# EAGLE board INTERFACE_LPC11u35 (EAGLE 7.6.0)
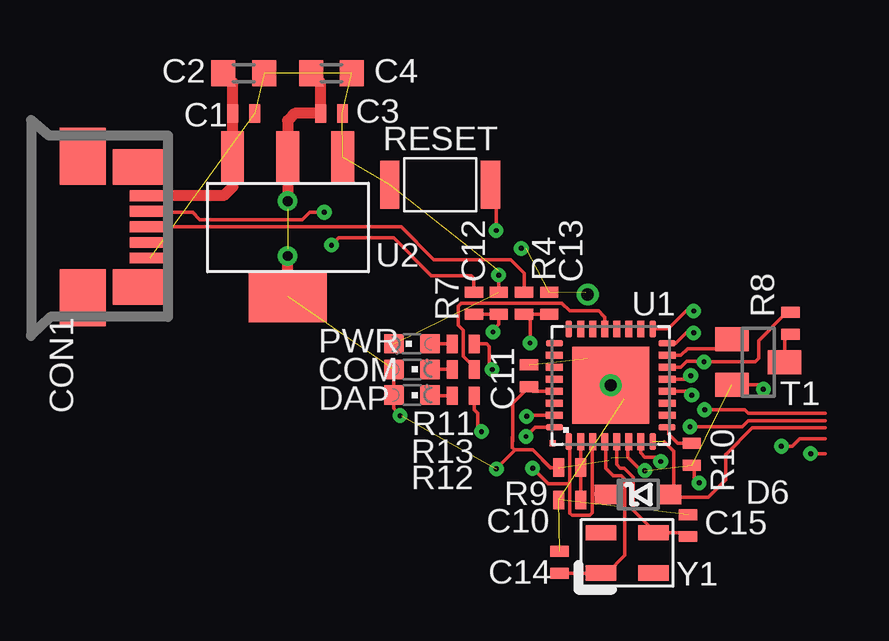
[diagram p0: board, top side]
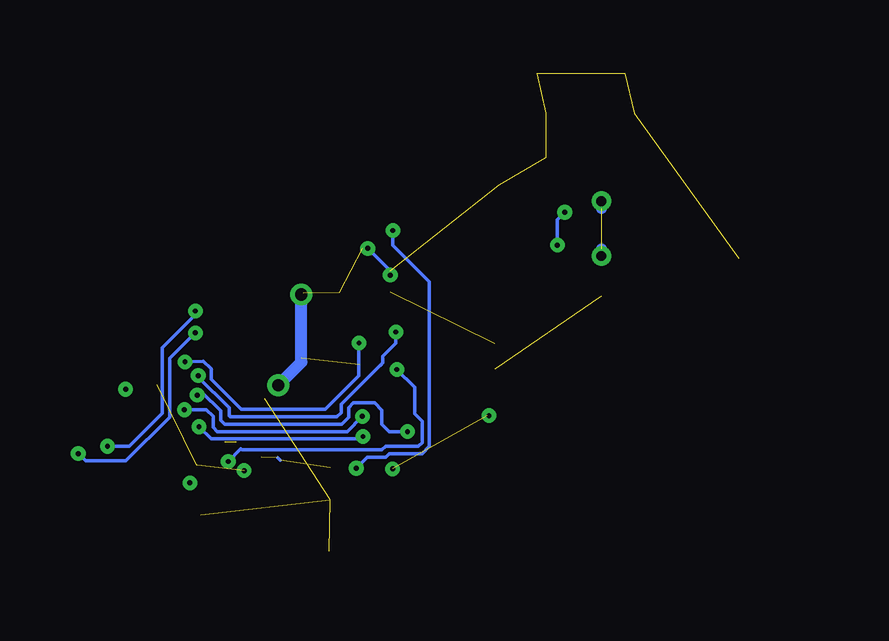
[diagram p1: board, bottom side, seen from below]

No outline drawn. Coordinates in mm, seen from the top.
Copper layers ((1*16)): Top 0.035mm / dielectric 0.8mm / Bottom 0.035mm
Design rules "mbed-HDK-6-6-2-layer": minimum track width 6mil, minimum drill 9mil, track to track 6mil, track to pad 6mil, pad to pad 6mil, via to via 6mil, smd to smd 6mil, copper to edge 15mil, drill to drill 8mil, minimum pad ring 10mil, minimum via ring 8mil, stop-mask expansion 4mil, vias tented up to drill 0mil, thermal gap 10mil

## Footprints (pad centres in the part's own frame; a part is rotated, then mirrored left to right if it is on the bottom)
0402 = smd 0.457 x 0.762: 1 -0.457,0; 2 0.457,0
0603 = smd 1 x 1.1: 1 -0.85,0; 2 0.85,0
USB-MICRO-B-H = smd 1.7 x 0.45: 4 2.8,-0.65; D+ 2.8,0; D- 2.8,0.65; GND 2.8,-1.3; VBUS 2.8,1.3 | smd 1.9 x 2.375: GND1 0,2.95; GND4 0,-2.95 | smd 2.1 x 1.475: GND2 2.3,2.5; GND3 2.3,-2.5
SOD323 = smd 1 x 0.8: A 1.3,0; K -1.3,0
CHIPLED_0603 = smd 0.8 x 0.8: A 0,-0.75; C 0,0.75
SKRKAEE010 = smd 0.8 x 2: P$1 -2.1,0; P$2 2.1,0
SOT23-3 = smd 1 x 1.4: 1 -0.95,-1.1; 2 0.95,-1.1; 3 0,1.1
HVQFN33 = smd 0.7 x 0.28: 1 -2.35,1.75; 2 -2.35,1.25; 3 -2.35,0.75; 4 -2.35,0.25; 5 -2.35,-0.25; 6 -2.35,-0.75; 7 -2.35,-1.25; 8 -2.35,-1.75; 17 2.35,-1.75; 18 2.35,-1.25; 19 2.35,-0.75; 20 2.35,-0.25; 21 2.35,0.25; 22 2.35,0.75; 23 2.35,1.25; 24 2.35,1.75 | smd 0.28 x 0.7: 9 -1.75,-2.35; 10 -1.25,-2.35; 11 -0.75,-2.35; 12 -0.25,-2.35; 13 0.25,-2.35; 14 0.75,-2.35; 15 1.25,-2.35; 16 1.75,-2.35; 25 1.75,2.35; 26 1.25,2.35; 27 0.75,2.35; 28 0.25,2.35; 29 -0.25,2.35; 30 -0.75,2.35; 31 -1.25,2.35; 32 -1.75,2.35 | smd 3.2 x 3.2: EXP 0,0 | smd 0.25 x 0.25: M1 -2.415,2.415
SOT223 = smd 0.95 x 2.15: GND -2.3,-5.8; IN 2.3,-5.8; OUT(1) 0,-5.8 | smd 3.25 x 2.15: OUT(2) 0,0
3.2X.2.5 = smd 1.27 x 0.635: P$1 -1.092,-0.838; P$2 1.092,-0.838; P$3 1.092,0.838; P$4 -1.092,0.838

## Placement (x,y rotation side)
C1  100nF  [0402]  -7.16,9.6 0 top
C2  10uF  [0603]  -7.16,11.28 0 top
C3  100nF  [0402]  -3.51,9.6 0 top
C4  10uF  [0603]  -3.51,11.28 0 top
C10  100nF  [0402]  6.43,-6.5 180 top
C11  100nF  [0402]  4.72,-1.32 90 top
C12  18pF  [0402]  3.47,1.7 90 top
C13  18pF  [0402]  5.57,1.7 90 top
C14  18pF  [0402]  5.99,-9.09 90 top
C15  18pF  [0402]  11.35,-7.57 90 top
CON1  47346-0001  [USB-MICRO-B-H]  -13.87,4.88 0 top
D6  BAT60J  [SOD323]  9.27,-6.27 0 top
LED3  RED  [CHIPLED_0603]  -0.15,0 90 top
LED4  BLUE  [CHIPLED_0603]  -0.15,-2.13 270 top
LED5  GREEN  [CHIPLED_0603]  -0.15,-1.07 270 top
R4  33R  [0402]  4.52,1.7 270 top
R7  33R  [0402]  2.43,1.7 270 top
R8  1.5K  [0402]  15.62,0.85 90 top
R9  10K  [0402]  6.43,-5.16 0 top
R10  10K  [0402]  11.51,-4.61 90 top
R11  470R  [0402]  1.98,0 0 top
R12  1.5K  [0402]  1.98,-2.16 0 top
R13  1.5K  [0402]  1.98,-1.07 0 top
RESET  SKRKAEE010  [SKRKAEE010]  1.02,6.63 0 top
T1  BSS84  [SOT23-3]  14.27,-0.76 270 top
U1  [HVQFN33]  8.13,-1.73 90 top
U2  TLV1117LV33DCYR  [SOT223]  -5.33,1.98 180 top
Y1  7M-12.000MAAJ-T  [3.2X.2.5]  8.81,-8.71 0 top

## Library data of the parts
C1 C3 C10-C15 R4 R7-R13 = mbed-HDK-RLCQ
C2 C4 = mbed-HDK-RLC
CON1 = mbed-HDK-Connector; MF: MOLEX; MFN: 47346-0001; OC-MOUSER: 538-47346-0001; OC-NEWARK: 1568026
D6 = mbed-HDK-Transistor; MF: STMicroelectronics; MFN: BAT60JFILM; OC-DIGIKEY: 497-3707-6-ND; OC-MOUSER: 511-BAT60JFILM; OC-NEWARK: 89K1218
LED3-LED5 = mbed-HDK-Optical; MF: Wurth Electronics Inc; MFN: 150060RS75000; OC-DIGIKEY: 732-4978-1-ND; OC-MOUSER: 710-150060RS75000; OC-NEWARK: 2322071
RESET = mbed-HDK-Switch; MF: ALPS; MFN: SKRKAEE010; OC-MOUSER: 688-SKRKAE
T1 = mbed-HDK-Transistor; MF: Fairchild Semiconductor; MFN: BSS84; OC-DIGIKEY: BSS84CT-ND; OC-MOUSER: 512-BSS84; OC-NEWARK: 58K8770
U1 = mbed-HDK-MF-NXP; MF: NXP; MFN: LPC11U35FHI33/501; OC-DIGIKEY: 568-9586-ND; OC-MOUSER: 771-LPC11U35FHI33501; OC-NEWARK: 2115658
U2 = mbed-HDK-Power; MF: Texas Instruments; MFN: TLV1117LV33DCYR; OC-DIGIKEY: 296-28778-1-ND; OC-MOUSER: 595-TLV1117LV33DCYR; OC-NEWARK: 2323647
Y1 = mbed-HDK-Oscillator; MF: TXC; MFN: 7M-12.000MAAJ-T; OC-DIGIKEY: 887-1121-1-ND; OC-MOUSER: 717-7M-12.000MAAJ-T; OC-NEWARK: 84R5706

## Nets
+3.3V: C3.1 C4.1 C11.1 LED4.A LED5.A R9.1 R10.1 T1.2 U1.6 U1.29 U2.OUT(1) U2.OUT(2)
GND: C1.2 C2.2 C3.2 C4.2 C10.2 C11.2 C12.2 C13.2 C14.2 C15.2 CON1.GND LED3.C RESET.P$1 U1.EXP U2.GND
HID: R12.2 U1.12
IF_NRESET: C10.1 R9.2 U1.2
ISP: D6.K RESET.P$2 U1.1 U1.3
MSD: R11.2 U1.7
N$1: C1.1 C2.1 CON1.VBUS U2.IN
N$2: LED3.A R11.1
N$21: C13.1 R4.2 R8.2 U1.14
N$24: C12.1 R7.2 U1.13
N$26: T1.1 U1.15
N$27: R8.1 T1.3
N$28: R10.2 U1.9
N$35: LED4.C R12.1
N$36: LED5.C R13.1
N$37: C15.1 U1.5 Y1.P$3
N$40: C14.1 U1.4 Y1.P$1
TGT_NRESET: D6.A U1.8
TGT_RX: U1.32
TGT_SWCLK: U1.16
TGT_SWDIO: U1.17
TGT_TX: U1.31
TGT_USB_D+: CON1.D+ R4.1
TGT_USB_D-: CON1.D- R7.1
UART: R13.2 U1.21

## Tracks (layer width: path | path; a pad name or v marks a point on that pad's centre or on a via)
+3.3V  (via drill 0.2, 0.41)  (7 unrouted)
  Top 0.152: 4.92,-1.98 U1.29 4.95,-1.98 4.73,-1.76 | v9.55,-5.28 9.4,-5.28 8.84,-4.72 8.84,-4.12 U1.6 | R10.1 11.53,-5.05 11.61,-5.13 11.61,-5.59 v11.81,-5.79 | LED5.A LED4.A -0.9,-2.69 v-0.65,-2.99 | 4.92,-1.98 C11.1 4.04,-2.47 4.04,-3.89 | 4.92,-1.98 4.88,-1.98 | 4.4,-4.42 4.88,-4.42 5.61,-5.16 R9.1 5.65,-5.16 5.64,-5.15 5.61,-5.15 4.88,-4.42 4.15,-4.42 | 4.04,-4.05 4.04,-3.89 | 4.15,-4.42 v3.36,-5.21 | T1.2 14.31,-1.71 v14.49,-1.89 | 4.15,-4.42 4.12,-4.42 4.03,-4.34 4.03,-3.9 4.04,-3.89
  Top 0.457: C4.1 -3.96,10.88 C3.1 -5.03,9.6 -5.33,9.3 U2.OUT(1) | -5.33,7.32 U2.OUT(1) | U2.OUT(1) v-5.33,5.94 | U2.OUT(2) v-5.33,3.66
  Bottom 0.152: 8.15,-4.75 8.05,-4.85 | v11.81,-5.79 11.81,-5.97 11.86,-6.02 | v-0.65,-2.99 -0.63,-2.94 -0.58,-2.99 | v3.36,-5.21 3.36,-5.39 3.38,-5.41 | v14.49,-1.89 14.49,-1.93 14.52,-1.96
  Bottom 0.457: v-5.33,5.94 -5.33,5.64 | v-5.33,3.66 -5.33,3.96
GND  (via drill 0.2, 0.51)  (14 unrouted)
  Top 0.152: C11.2 4.72,-0.7 | C12.2 3.47,2.86 v3.46,2.87 | v4.4,3.98 4.62,3.98 4.62,3.99
  Top 0.508: v7.16,2.06 7.09,2.13 7.09,2.21 | 7.16,-0.76 7.16,-0.61 8.13,-1.57 U1.EXP 8.69,-2.29
  Bottom 0.152: v3.46,2.87 3.46,3.04 v4.4,3.98
  Bottom 0.508: v7.16,2.06 7.16,-0.76 U1.EXP
  other vias: 8.13,-1.73
HID  (via drill 0.2)
  Top 0.152: U1.12 11.27,-1.98 v11.5,-2.14 | R12.2 2.44,-2.74 2.59,-2.9 2.59,-3.5 v2.74,-3.66
  Bottom 0.152: v11.5,-2.14 11.18,-2.13 10.65,-2.66 10.51,-2.8 10.51,-3.19 10.36,-3.35 5.48,-3.35 5.18,-3.05 5.18,-2.68 5.2,-2.66 5,-2.46 4.12,-2.46 3.81,-2.77 3.81,-3.35 3.5,-3.66 v2.74,-3.66
IF_NRESET
  Top 0.152: U1.2 R9.2 C10.1
ISP  (via drill 0.2)
  Top 0.152: U1.1 6.38,-4.37 6.43,-4.37 6.43,-5.83 | 7.37,-6.25 7.37,-7.03 7.25,-7.14 6.52,-7.14 6.43,-7.06 | 7.37,-6.25 7.37,-4.09 U1.3 | D6.K 7.39,-6.27 7.37,-6.25 | RESET.P$2 3.35,6.33 v3.35,4.72 | v4.88,-5.18 5.33,-5.64 5.34,-5.64 5.53,-5.83 6.43,-5.83 | 6.43,-7.06 | 6.43,-7.06 6.42,-7.05 6.42,-5.83 6.43,-5.83
  Bottom 0.152: v3.35,4.72 3.35,4.12 1.83,2.59 1.83,-4.27 2.13,-4.57 3.5,-4.57 3.66,-4.72 4.42,-4.72 v4.88,-5.18
MSD  (via drill 0.2)
  Top 0.152: v10.21,-4.9 10.16,-4.9 9.98,-4.72 9.55,-4.72 9.37,-4.55 U1.7 | R11.2 2.96,0 3.07,-0.11 3.07,-0.96 v3.19,-1.07
  Bottom 0.152: v10.21,-4.9 9.69,-4.38 9.65,-4.42 3.81,-4.42 3.66,-4.27 2.29,-4.27 2.13,-4.12 2.13,-3.23 2.45,-2.92 2.45,-1.81 v3.19,-1.07 3.25,-1.07
N$1
  Top 0.457: -7.62,7.79 -7.62,6.55 -8,6.18 CON1.VBUS | -7.62,7.79 U2.IN | -7.62,7.79 C1.1 -7.62,10.88 C2.1
N$2
  Top 0.152: LED3.A R11.1
N$21  (via drill 0.2)
  Top 0.152: U1.14 11.05,-0.98 11.29,-0.73 12.02,-0.73 v12.01,-0.75 12.05,-0.75 14.14,-0.75 14.29,-0.61 14.29,0.14 15.47,1.31 R8.2 | v4.76,0.04 4.78,0.98 R4.2 C13.1
  Bottom 0.152: v12.01,-0.75 11.25,-0.73 10.95,-1.02 10.91,-1.06 10.91,-1.48 9.9,-2.49 9.67,-2.72 6.17,-2.72 5.22,-1.77 5.21,-1.77 5.21,-1.76 4.78,-1.32 v4.76,0.04
N$24  (via drill 0.2)
  Top 0.152: U1.13 11.31,-1.48 v11.46,-1.32 | R7.2 C12.1 3.47,0.81 3.26,0.6 | 3.26,0.6 | 3.26,0.6 3.23,0.57 v3.23,0.49
  Bottom 0.152: v11.46,-1.32 11.46,-1.38 10.17,-2.67 10.17,-3 10.13,-3.04 5.68,-3.04 5.51,-2.87 5.51,-2.52 5.05,-2.06 4,-1.01 3.87,-0.88 3.77,-0.79 3.77,-0.51 3.23,0.04 v3.23,0.49
N$26
  Top 0.152: U1.15 11.05,-0.48 11.33,-0.2 12.79,-0.2 T1.1
N$27
  Top 0.152: T1.3 15.38,0.15 R8.1
N$28
  Top 0.152: R10.2 10.92,-4.14 10.54,-3.76 10.54,-3.54 U1.9
N$35
  Top 0.152: R12.1 0.62,-2.16 LED4.C
N$36
  Top 0.152: R13.1 LED5.C
N$37
  Top 0.152: C15.1 11.2,-7.87 Y1.P$3 9.91,-7.77 9.07,-6.93 9.07,-5.56 8.69,-5.18 8.53,-5.18 8.38,-5.03 U1.5
N$40
  Top 0.152: C14.1 Y1.P$1 7.98,-9.55 8.71,-8.81 8.71,-5.64 8.56,-5.49 8.23,-5.49 7.92,-5.18 7.92,-4.08 U1.4
TGT_NRESET  (1 unrouted)
  Top 0.152: 10.59,-6.14 D6.A 10.65,-6.14 | 10.35,-4.08 10.74,-4.47 10.74,-6 10.65,-6.14 | 12.95,-4.57 14.02,-3.5 17.07,-3.5 | 12.95,-4.59 12.95,-4.57 | 12.95,-4.57 12.93,-4.59 12.93,-5.66 12.19,-6.4 10.91,-6.4 10.65,-6.14
TGT_RX  (via drill 0.2)
  Top 0.152: U1.32 4.98,-3.48 v4.6,-3.86 | v11.43,-3.45 13.61,-3.45 13.87,-3.2 17.07,-3.2
  Bottom 0.152: v4.6,-3.86 4.67,-3.86 4.67,-3.91 4.72,-3.96 10.92,-3.96 v11.43,-3.45 11.38,-3.5
TGT_SWCLK  (via drill 0.2)
  Top 0.152: U1.16 10.84,0.02 11.28,0.46 v11.58,0.46 | v16.46,-4.57 17.07,-4.57
  Bottom 0.152: v11.58,0.46 12.65,-0.61 12.65,-3.05 14.48,-4.88 16.15,-4.88 v16.46,-4.57
TGT_SWDIO  (via drill 0.2)
  Top 0.152: U1.17 10.53,0.62 11.28,1.37 v11.58,1.37 | v15.24,-4.27 15.7,-4.27 16,-3.96 17.07,-3.96
  Bottom 0.152: v11.58,1.37 11.58,1.22 12.95,-0.15 12.95,-2.9 14.33,-4.27 v15.24,-4.27
TGT_TX  (via drill 0.2)
  Top 0.152: U1.31 4.67,-2.98 v4.62,-3.02 | v12.04,-2.74 13.72,-2.74 13.87,-2.9 17.07,-2.9
  Bottom 0.152: v12.04,-2.74 11.12,-2.74 10.85,-3.02 10.85,-3.48 10.67,-3.66 5.26,-3.66 v4.62,-3.02
TGT_USB_D+
  Top 0.152: R4.1 4.52,2.95 3.96,3.5 0.76,3.5 -0.61,4.88 CON1.D+
TGT_USB_D-  (via drill 0.2)
  Top 0.152: R7.1 2.43,2.73 2.31,2.85 0.66,2.85 -0.91,4.42 -3.2,4.42 v-3.5,4.12 | v-3.81,5.49 -4.42,5.49 -4.72,5.18 -8.99,5.18 -9.3,5.49 -11.03,5.49 CON1.D-
  Bottom 0.152: v-3.5,4.12 -3.5,5.18 v-3.81,5.49
UART
  Top 0.152: U1.21 7.88,1.12 7.82,1.18 7.81,1.18 7.62,1.37 6.42,1.37 6.1,1.7 1.91,1.7 1.77,1.57 1.77,0.78 1.96,0.6 | 1.96,0.6 | 1.96,0.6 1.99,0.57 1.99,-0.52 2.44,-0.97 R13.2

## Text on the board
tPlace: PWR | COM | DAP